# Altium PCB Right_Flex.PcbDoc
Units mm, origin at the board's own origin, x right, y up, seen from the top; angles counter-clockwise.
Board outline 14.38 x 9.98 mm, 2 copper layers (Top Layer, Bottom Layer), stack 0.049 mm thick; 2 components, 26 nets, 88 pads, 70 vias.
Unrouted connection lines stored in the file: 75.
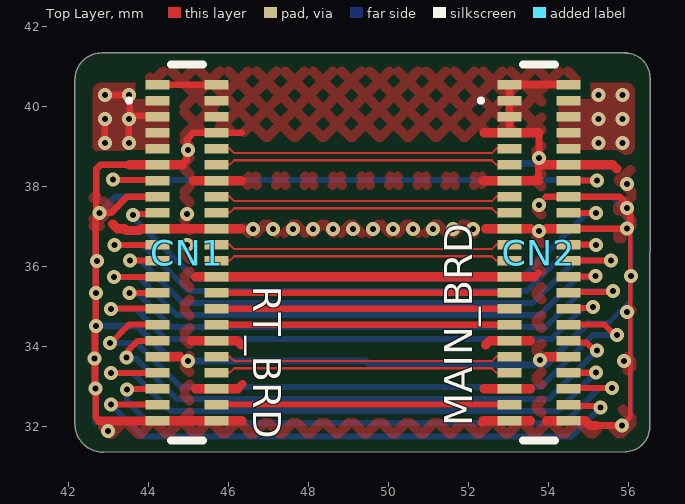
[diagram p0: Top Layer view]
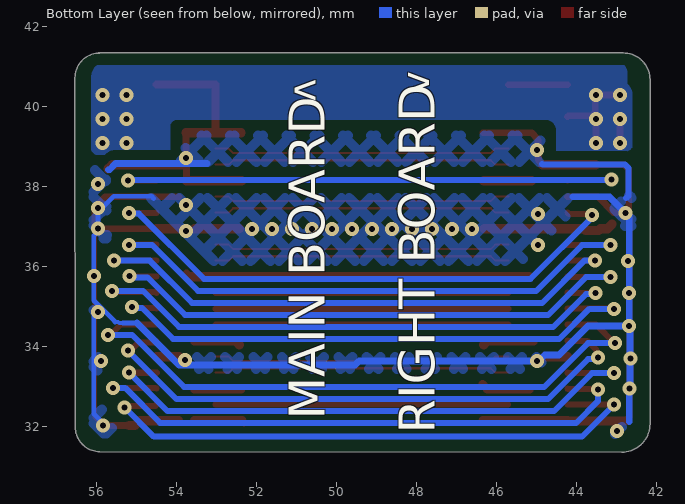
[diagram p1: Bottom Layer view, seen from below]

## Layer stack, top to bottom
Top Solder: solder mask 0.0275, Solder Resist, Dk 2.9
Top Layer: signal copper 0.012
Dielectric1: prepreg 0.025, FR-4, Dk 3.3
Bottom Layer: signal copper 0.012
Bottom Solder: solder mask 0.0275, Solder Resist, Dk 2.9

## Board outline
42.153,32.076 42.153,40.682 cw(c42.821,40.682) 42.821,41.35 55.95,41.35 55.91,41.347 cw(c55.91,40.727) 56.53,40.727 56.523,32 cw(c55.905,32) 55.905,31.382 55.926,31.382 42.861,31.368 cw(c42.861,32.076)

## Design rules (kind name [scope] priority, off if disabled: settings)
BoardOutlineClearance Stiffener [OnLayer('Stiffener')] p1: gap=0 ignorepadtopadclearanceinfootprint=FALSE except(0.3: Track-OutlineEdge Track-CutoutEdge THPad-OutlineEdge THPad-CutoutEdge Via-OutlineEdge Via-CutoutEdge Fill-CutoutEdge Poly-CutoutEdge Region-CutoutEdge)
BoardOutlineClearance BoardOutlineClearanceAll [All] p2: gap=0 ignorepadtopadclearanceinfootprint=FALSE except(0.3: Track-OutlineEdge Track-CutoutEdge SMDPad-OutlineEdge THPad-OutlineEdge THPad-CutoutEdge Via-OutlineEdge Via-CutoutEdge Fill-OutlineEdge Fill-CutoutEdge Poly-OutlineEdge Poly-CutoutEdge Region-CutoutEdge)
Clearance [All] p1: gap=0.254 ignorepadtopadclearanceinfootprint=FALSE except(0: Via-Text Fill-Text Poly-Text Region-Text; 0.076: Arc-Arc Arc-Track Track-Track; 0.1: Arc-Via Track-Via; 0.127: SMDPad-SMDPad; 0.15: Arc-SMDPad Track-SMDPad Text-Text; 0.2: Arc-THPad Arc-Text Arc-Hole Track-THPad Track-Text Track-Hole SMDPad-THPad SMDPad-Via SMDPad-Text SMDPad-Hole THPad-THPad THPad-Via THPad-Text THPad-Hole Via-Via Via-Hole Fill-Hole Poly-Hole Region-Hole Text-Hole)
DiffPairsRouting [InDifferentialPairClass('All Differential Pairs')] p1: maxlimit=0.127 minlimit=0.127 mostfreqgap=0.127 toplayer_minwidth=0.052 toplayer_maxwidth=0.052 toplayer_prefwidth=0.052 bottomlayer_minwidth=0.052 bottomlayer_maxwidth=0.052 bottomlayer_prefwidth=0.052 maxuncoupledlength=12.7
HoleSize [All] p1: absolutevalues=TRUE maxlimit=7.62 minlimit=0.15 maxpercent=80.000 minpercent=20.000
HoleToHoleClearance [IsPad vs IsPad] p1: gap=0.45 allowstackedmicrovias=TRUE
MatchedLengths MatchedLengths_1 [All] p1: tolerance=0.127 checknetsindiffpair=TRUE checkdiffpairvsdiffpair=FALSE checkxsignals=FALSE checkothers=FALSE
MinimumAnnularRing [All] p1: minimumring=0.1
MinimumSolderMaskSliver [All] p1: minsoldermaskwidth=0
PlaneClearance [All] p1: clearance=0.3
PlaneConnect [All] p1: pad.planeconnectstyle=Relief pad.reliefexpansion=0.508 pad.reliefentries=4 pad.reliefconductorwidth=0.254 pad.reliefairgap=0.254 via.planeconnectstyle=Direct via.reliefexpansion=0.508 via.reliefentries=4 via.reliefconductorwidth=0.254 via.reliefairgap=0.254
PolygonConnect ALL [All] p1: connectstyle=Direct reliefconductorwidth=0.254 reliefentries=4 polygonreliefangle="90 Angle" airgapwidth=0.254
PolygonConnect 3V3 [InNet('+3V3')] p2: connectstyle=Direct reliefconductorwidth=0.254 reliefentries=4 polygonreliefangle="90 Angle" airgapwidth=0.254
PolygonConnect GND [InNet('GND')] p3: thpad.connectstyle=Relief thpad.reliefconductorwidth=0.254 thpad.reliefentries=4 thpad.polygonreliefangle="90 Angle" thpad.airgapwidth=0.254 smdpad.connectstyle=Relief smdpad.reliefconductorwidth=0.254 smdpad.reliefentries=4 smdpad.polygonreliefangle="90 Angle" smdpad.airgapwidth=0.254 via.connectstyle=Direct via.reliefconductorwidth=0.254 via.reliefentries=4 via.polygonreliefangle="90 Angle" via.airgapwidth=0.254
PolygonConnect 5V [InNet('+5V')] p4: connectstyle=Direct reliefconductorwidth=0.254 reliefentries=4 polygonreliefangle="90 Angle" airgapwidth=0.254
RoutingVias [All] p1: holewidth=0.15 width=0.35 viastyle="Through Hole" minholewidth=0.15 minwidth=0.35 maxholewidth=0.254 maxwidth=0.508
SMDNeckDown [All] p1: percent=200.000
SilkToSilkClearance [All] p1: silktosilkclearance=0.15
SilkToSolderMaskClearance SilkscreenOverComponentPads [IsPad] p1: minsilkscreentomaskgap=0.15 clearancetoexposedcopper=TRUE
SolderMaskExpansion [All] p1: expansion=0.1 istentingtop=FALSE
Width [All] p1: maxlimit=4 minlimit=0.051 preferedwidth=0.17
22 further rules are at their usual default settings.

## Classes and differential pairs
differential pair class "USB 2.0": E2
differential pair class "PCIe Gen 3x1": PCIE_CLK PCIE_RX PCIE_TX
differential pair PCIE_TX: +PCIE_TX_P -PCIE_TX_N
differential pair PCIE_RX: +PCIE_RX_P -PCIE_RX_N
differential pair PCIE_CLK: +PCIE_CLK_P -PCIE_CLK_N
differential pair E2: +E2_P -E2_N

## Components (designator, comment, footprint, x,y, rotation, side; value= is the part's Value field where it differs from the comment)
CN1 "RT_BRD" BM20B0840DP04V53 44.958,36.357 r90 top locked
CN2 "MAIN_BRD" BM20B0840DP04V53 53.752,36.357 r90 top

## Footprints (in the part's own frame and the unit in brackets; to place one, negate y for a bottom-side part, rotate by r counter-clockwise, add the part's x,y. Pads: shape width x height; smd on the part's side, far side on the other; paste and mask are expansions set on the pad)
BM20B0840DP04V53 [mm]
  rect 0.23x0.6 smd mask+0.09: 1(3.8,0.74) 2(3.8,-0.74) 3(3.4,0.74) 4(3.4,-0.74) 5(3,0.74) 6(3,-0.74) 7(2.6,0.74) 8(2.6,-0.74) 9(2.2,0.74) 10(2.2,-0.74) 11(1.8,0.74) 12(1.8,-0.74) 13(1.4,0.74) 14(1.4,-0.74) 15(1,0.74) 16(1,-0.74) 17(0.6,0.74) 18(0.6,-0.74) 19(0.2,0.74) 20(0.2,-0.74) 21(-0.2,0.74) 22(-0.2,-0.74) 23(-0.6,0.74) 24(-0.6,-0.74) 25(-1,0.74) 26(-1,-0.74) 27(-1.4,0.74) 28(-1.4,-0.74) 29(-1.8,0.74) 30(-1.8,-0.74) 31(-2.2,0.74) 32(-2.2,-0.74) 33(-2.6,0.74) 34(-2.6,-0.74) 35(-3,0.74) 36(-3,-0.74) 37(-3.4,0.74) 38(-3.4,-0.74) 39(-3.8,0.74) 40(-3.8,-0.74) MP1(4.2,0.74) MP2(4.2,-0.74) MP3(-4.2,0.74) MP4(-4.2,-0.74)
  silkscreen extent -4.7,-0.4 4.7,1.5, body extent -4.7,-1.02 4.7,1.02, height 0.86

## Part data
CN1 CN2: library part BM20B(0.8)-40DP-0.4V(53), "Connector", Manufacturer_Name=Hirose, Manufacturer_Part_Number=BM20B(0.8)-40DP-0.4V(51), Supplier Part Number 1=798-BM20B0840DP04V53, Datasheet Link=https://www.hirose.com/en/product/document?clcode=CL0684-9005-6-51&productname=BM20B(0.8)-40DP-0.4V(51)&series=BM20&documenttype=2DDrawing&lang=en&documentid=0000948948, Height=0.76mm, Supplier 1=Mouser, System=Connector

## Via types
v1: diameter 0.35, hole 0.15, Top Layer to Bottom Layer, tented both sides, 70 vias

## Nets (pads, with @x,y where several pads share a name; then routed paths per layer and width w, separated by ;. In a path a pad name is that pad's centre, name@x,y a point inside that pad or via, vN(x,y) a via of type N, cw(c..) or ccw(c..) an arc to the next point about the centre after c; other vN are vias at no path point)
+3V3: CN1.1 CN1.3 CN1.5 CN1.7 CN2.2 CN2.4 CN2.6 CN2.8 | length 3
  Top Layer w0.17: v1(42.9,39.1) v1(42.9,39.7) ; v1(42.9,40.3) v1(43.5,40.3) 43.522,40.278 43.522,39.878 43.622,39.778 44.197,39.778 CN1.3 ; v1(43.5,39.1) v1(43.5,39.7)
  other v1: 55.244,39.1 55.844,39.1 55.244,39.7 55.844,39.7 55.244,40.3 55.844,40.3
DOWN: CN1.31 CN2.32 | length 14.5
  Top Layer w0.15: v1(43.448,33.737) 43.486,33.776 43.486,33.916 43.724,34.154 44.215,34.154 CN1.31 ; CN2.32@54.499,34.15 54.532,34.117 54.939,34.117 55.149,33.906 v1(55.203,33.906)
  Bottom Layer w0.15: v1(43.448,33.737) 43.486,33.699 43.701,33.699 44.7,32.7 53.996,32.7 v1(55.203,33.906)
E2_N: CN1.36 CN2.35 | length 7.4
  Top Layer w0.052: CN1.36 46.024,33.357 46.135,33.467 52.576,33.467 52.686,33.357 CN2.35
E2_P: CN1.34 CN2.33 | length 7.4
  Top Layer w0.052: CN1.34 46.024,33.757 46.135,33.646 52.576,33.646 52.686,33.757 CN2.33
GND: CN1.2 CN1.4 CN1.6 CN1.9 CN1.12 CN1.13 CN1.17 CN1.18 CN1.24 CN1.32 CN1.33 CN1.38 CN1.MP1 CN1.MP2 CN1.MP3 CN1.MP4 CN2.1 CN2.3 CN2.5 CN2.10 CN2.11 CN2.14 CN2.17 CN2.18 CN2.23 CN2.31 CN2.34 CN2.37 CN2.MP1 CN2.MP2 CN2.MP3 CN2.MP4 | length 92.5
  Top Layer w0.12: v1(55.826,32.033) 56.035,32.242 56.035,36.81 55.95,36.895 v1(55.95,36.957)
  Top Layer w0.15: 46.325,32.157 46.336,32.146
  Top Layer w0.17: v1(42.637,33.705) 42.654,33.688 42.654,32.997 42.671,32.98 42.671,32.249 42.774,32.146 ; v1@42.674,33.674 42.656,33.693 42.656,34.507 v1(42.675,34.525) v1(42.675,35.35) 42.674,36.15 v1@42.674,37.215 ; 43.51,38.553 42.786,38.553 42.687,38.454 42.687,37.431 v1(42.764,37.353) 43.053,37.353 43.457,37.757 CN1.13 ; CN1.MP3@44.207,32.146 CN1.MP3 ; CN1.9@44.214,38.553 CN1.9 ; CN1.MP1 CN1.MP2 ; 44.779,33.757 44.782,33.76 ; 44.839,38.557 44.941,38.658 44.941,38.891 v1(44.975,38.925) 44.95,38.95 44.95,39.188 45.119,39.357 CN1.6 46.325,39.357 ; 52.3,32.1 52.357,32.157 ; 53.644,35.754 53.744,35.853 ; 53.744,38.15 53.744,38.55 53.751,38.557 53.751,38.724 v1(53.75,38.725) 53.752,38.727 53.752,39.357 ; 53.922,37.757 CN2.14 55.768,37.757 56.037,37.488 v1@56.037,36.957 ; CN2.18 v1(55.95,36.957) ; 55.171,32.033 v1(55.826,32.033)
  Top Layer w0.2: 46.223,32.957 46.336,33.07 ; 52.368,32.968 52.379,32.957 ; CN2.5 CN2.3 CN2.1 CN2.MP1 CN2.MP2
  Top Layer w0.23: 42.774,32.146 CN1.MP3@44.207,32.146 ; 43.1,37.075 43.218,36.957 43.391,36.957 43.438,36.91 43.762,36.91 43.809,36.957 CN1.17 CN1.18 46.305,36.957 ; 43.51,38.553 CN1.9@44.214,38.553 ; CN1.MP3 CN1.MP4 46.325,32.157 ; CN1.33 44.779,33.757 ; CN1.9 44.839,38.557 ; 45.068,34.157 CN1.32 46.212,34.157 46.312,34.057 ; 45.119,38.157 CN1.12 46.305,38.157 46.312,38.15 ; 45.165,32.957 CN1.38 46.223,32.957 ; 45.175,35.757 CN1.24 53.067,35.757 CN2.23@53.069,35.755 ; 52.357,32.157 CN2.MP3 53.542,32.157 ; 52.362,38.157 CN2.11 53.737,38.157 53.744,38.15 ; 52.379,32.957 CN2.37 53.542,32.957 53.543,32.956 ; 52.379,39.357 CN2.5 53.752,39.357 ; 52.421,34.054 52.524,34.157 CN2.31 53.543,34.157 ; 52.421,36.957 CN2.17 53.542,36.957 ; CN2.23@53.069,35.754 53.644,35.754 ; v1@53.751,38.557 CN2.10 55.596,38.557 55.7,38.453 ; 53.929,33.757 CN2.34 ; 53.944,32.157 54.911,32.157 55.035,32.033 55.171,32.033 ; 53.944,36.957 CN2.18
  Bottom Layer w0.1: 55.327,34.6 55.422,34.6 55.448,34.627 55.527,34.627
  Bottom Layer w0.12: 54.558,37.709 54.615,37.766 55.561,37.766 55.95,37.377 v1(55.95,36.957) 55.95,36.895 56.061,36.784 56.061,35.161 55.527,34.627 ; 54.975,34.6 55.327,34.6 ; v1(55.826,32.033) 55.826,32.095 56.061,32.33 v1@56.061,34.8
  Bottom Layer w0.15: 42.749,37.72 42.694,37.775 42.694,38.477 42.782,38.565 44.847,38.565 44.852,38.57
  Bottom Layer w0.17: v1(42.637,33.705) 42.654,33.688 42.654,32.975 v1(42.671,32.958) ; 42.674,32.132 v1@42.674,32.977 ; v1@42.674,33.674 42.656,33.693 42.656,34.575 42.674,34.594 v1(42.675,35.35) 42.674,36.15 v1@42.674,37.274 ; v1(42.675,34.525) 43.7,34.525 44.425,33.8 44.785,33.8 44.935,33.65 49.424,33.65 49.524,33.55 53.925,33.55 54.975,34.6 ; v1(42.764,37.353) 43.165,37.754 44.078,37.754 ; 53.226,38.58 53.229,38.583 55.515,38.583 55.668,38.43 55.689,38.43
  other v1: 42.975,31.9 44.975,33.65 55.875,33.65 53.775,33.675 55.95,34.875 56.05,35.775 42.7,36.15 44.95,36.55 53.75,36.9 46.6,36.95 47.1,36.95 47.6,36.95 48.1,36.95 48.6,36.95 49.1,36.95 49.6,36.95 50.1,36.95 50.6,36.95 51.1,36.95 51.6,36.95 52.1,36.95 44.95,37.325 55.95,37.475 53.75,37.55 55.95,38.075
HK/MISO: CN1.23 CN2.24 | length 14.6
  Top Layer w0.15: v1(43.135,35.746) 43.141,35.752 44.212,35.752 CN1.23 ; CN2.24 54.498,35.763 55.163,35.763 v1(55.169,35.769)
  Bottom Layer w0.15: v1(43.135,35.746) 43.754,35.746 44.7,34.8 53.775,34.8 54.711,35.736 55.136,35.736 v1(55.169,35.769)
L1/SCK: CN1.19 CN2.20 | length 14.8
  Top Layer w0.15: v1(43.143,36.55) 44.211,36.55 CN1.19 ; CN2.20 54.494,36.555 55.175,36.555 v1(55.177,36.554)
  Bottom Layer w0.15: v1(43.143,36.55) 43.85,36.55 45,35.4 53.45,35.4 54.604,36.554 v1(55.177,36.554)
L2: CN1.37 CN2.38 | length 14.9
  Top Layer w0.15: v1(43.456,32.931) 43.469,32.944 44.205,32.944 CN1.37 ; CN2.38 54.512,32.977 v1(55.574,32.977)
  Bottom Layer w0.15: v1(43.456,32.931) 43.456,32.644 44,32.1 54.4,32.1 55.277,32.977 v1(55.574,32.977)
L3/MOSI: CN1.29 CN2.30 | length 16.3
  Top Layer w0.15: v1(43.034,34.1) 43.044,34.1 43.501,34.557 CN1.29 ; CN2.30 55.391,34.557 55.648,34.3 v1(55.7,34.3)
  Bottom Layer w0.15: v1(43.034,34.1) 43.7,34.1 44.8,33 53.8,33 55.1,34.3 v1(55.7,34.3)
LEFT: CN1.35 CN2.36 | length 14.8
  Top Layer w0.15: v1(43.057,33.35) 43.061,33.353 44.214,33.353 CN1.35
  Top Layer w0.17: CN2.36@54.493,33.356 v1(55.176,33.356)
  Bottom Layer w0.15: v1(43.057,33.35) 43.6,33.35 44.55,32.4 54.219,32.4 v1@55.175,33.356
LX: CN1.15 CN2.16 | length 14.3
  Top Layer w0.15: v1(43.6,37.3) 43.628,37.328 44.189,37.328 CN1.15 ; CN2.16 54.496,37.353 v1(55.181,37.353)
  Bottom Layer w0.15: v1(43.6,37.3) 43.6,37.246 45.146,35.7 53.3,35.7 54.935,37.335 55.162,37.335 v1(55.181,37.353)
LY: CN1.11 CN2.12 | length 13.9
  Top Layer w0.15: v1(43.11,38.19) 43.127,38.173 44.201,38.173 CN1.11 ; CN2.12 v1(55.203,38.157)
  Bottom Layer w0.15: v1(43.11,38.19) 43.126,38.173 55.186,38.173 v1(55.203,38.157)
PCIE_CLK_N: CN1.10 CN2.9 | length 7.4
  Top Layer w0.052: CN1.10 46.024,38.557 46.135,38.667 52.576,38.667 52.686,38.557 CN2.9
PCIE_CLK_P: CN1.8 CN2.7 | length 7.4
  Top Layer w0.052: CN1.8 46.024,38.957 46.135,38.846 52.576,38.846 52.686,38.957 CN2.7
PCIE_CLK_REQ: CN1.28 CN2.27 | length 7.3
  Top Layer w0.17: CN1.28 CN2.27
PCIE_EN: CN1.25 CN2.26 | length 14.6
  Top Layer w0.15: v1(43.519,35.352) 43.521,35.354 44.215,35.354 CN1.25 ; CN2.26@54.489,35.354 54.514,35.379 55.579,35.379 v1(55.6,35.4)
  Bottom Layer w0.15: v1(43.519,35.352) 43.55,35.321 43.754,35.321 44.575,34.5 53.925,34.5 54.825,35.4 v1(55.6,35.4)
PCIE_nWAKE: CN1.30 CN2.29 | length 7.3
  Top Layer w0.17: CN1.30 CN2.29
PCIE_RST: CN1.26 CN2.25 | length 7.3
  Top Layer w0.17: CN1.26 CN2.25
PCIE_RX_N: CN1.16 CN2.15 | length 7.4
  Top Layer w0.052: CN1.16 46.024,37.357 46.135,37.467 52.576,37.467 52.686,37.357 CN2.15
PCIE_RX_P: CN1.14 CN2.13 | length 7.4
  Top Layer w0.052: CN1.14 46.024,37.757 46.135,37.646 52.576,37.646 52.686,37.757 CN2.13
PCIE_TX_N: CN1.22 CN2.21 | length 7.4
  Top Layer w0.052: CN1.22 46.024,36.157 46.135,36.267 52.576,36.267 52.686,36.157 CN2.21
PCIE_TX_P: CN1.20 CN2.19 | length 7.4
  Top Layer w0.052: CN1.20 46.024,36.557 46.135,36.446 52.576,36.446 52.686,36.557 CN2.19
RIGHT: CN1.39 CN2.40 | length 14.9
  Top Layer w0.15: v1(43.054,32.557) CN1.39 ; CN2.40 54.521,32.529 55.243,32.529 v1(55.286,32.486)
  Bottom Layer w0.15: v1(43.054,32.557) 43.854,31.757 54.557,31.757 v1(55.286,32.486)
SELECT: CN1.21 CN2.22 | length 14.7
  Top Layer w0.15: v1@43.527,36.156 CN1.21@44.217,36.156 ; CN2.22 v1(55.558,36.157)
  Bottom Layer w0.15: v1(43.526,36.156) 43.794,36.156 44.85,35.1 53.6,35.1 54.657,36.157 v1(55.558,36.157)
UP: CN1.27 CN2.28 | length 14.5
  Top Layer w0.15: v1(43.057,34.954) 43.059,34.955 44.216,34.955 CN1.27 ; CN2.28 54.514,34.979 55.079,34.979 v1(55.1,35)
  Bottom Layer w0.15: v1(43.057,34.954) 43.671,34.954 44.425,34.2 54.075,34.2 54.855,34.98 55.08,34.98 v1(55.1,35)
VIB: CN1.40 CN2.39 | length 7.3
  Top Layer w0.15: CN1.40 CN2.39

## Polygon pours and split planes (outlines as drawn)
+3V3 on Bottom Layer "NONET_L01_P-001" (solid, pour order 13): 55.954,38.8 ccw(c55.954,38.971) 56.075,38.85 ccw(c55.954,38.971) 56.125,38.971 56.125,40.723 ccw(c55.698,40.723) 56,41.025 ccw(c55.759,40.784) 55.759,41.125 42.981,41.125 ccw(c42.981,40.869) 42.8,41.05 ccw(c42.981,40.869) 42.725,40.869 42.725,40.646 cw(c42.554,40.646) 42.675,40.525 ccw(c42.856,40.344) 42.6,40.344 42.6,38.971 ccw(c42.771,38.971) 42.65,38.85 ccw(c42.771,38.971) 42.771,38.8 43.615,38.8 ccw(c43.615,38.885) 43.675,38.825 cw(c43.735,38.765) 43.735,38.85 44.415,38.85 ccw(c44.415,38.935) 44.475,38.875 ccw(c44.415,38.935) 44.5,38.935 44.5,39.419 cw(c44.756,39.419) 44.575,39.6 cw(c44.756,39.419) 44.756,39.675 53.979,39.675 cw(c53.979,39.504) 54.1,39.625 cw(c53.979,39.504) 54.15,39.504 54.15,38.935 ccw(c54.235,38.935) 54.175,38.875 ccw(c54.235,38.935) 54.235,38.85 54.89,38.85 cw(c54.89,38.765) 54.95,38.825 ccw(c55.01,38.885) 55.01,38.8 55.075,38.8
GND on Bottom Layer "NONET_L01_P-001" (hatched 45Degree grid 0.5 track 0.25, remove dead copper, pour order 19): 42.604,42.5 ccw(c42.604,41.646) 42,42.25 ccw(c42.604,41.646) 41.75,41.646 41.75,31.604 ccw(c42.604,31.604) 42,31 ccw(c42.604,31.604) 42.604,30.75 56.146,30.75 ccw(c56.146,31.604) 56.75,31 ccw(c56.146,31.604) 57,31.604 57,41.146 ccw(c56.146,41.146) 56.75,41.75 ccw(c56.146,41.146) 56.146,42 54.604,42 cw(c54.604,42.854) 54,42.25 ccw(c53.396,41.646) 53.396,42.5 50.75,42.5
no net on Bottom Courtyard "NONET_L01_P-001" (solid): 42.161,40.685 42.161,32.048 ccw(c42.83,32.048) 42.83,31.379 46.334,31.379 ccw(c46.284,32.073) 46.979,32.07 46.988,40.649 ccw(c46.341,40.696) 46.436,41.338 42.816,41.34 ccw(c42.816,40.685)
no net on Bottom Courtyard "NONET_L01_P-001" (solid): 52.371,41.35 ccw(c52.356,40.737) 51.742,40.751 51.742,31.995 ccw(c52.342,31.989) 52.349,31.389 55.931,31.389 ccw(c55.931,31.979) 56.521,31.979 56.53,40.74 ccw(c55.923,40.741) 55.924,41.348
no net on Bottom Courtyard "NONET_L04_P-001" (solid, pour order 8): 43.44,41.276 43.44,31.45 46.497,31.45 46.497,41.251 46.472,41.276
GND on Top Layer "NONET_L01_P-001" (hatched 45Degree grid 0.5 track 0.25, remove dead copper, pour order 14): 42.354,42.5 ccw(c42.354,41.646) 41.75,42.25 ccw(c42.354,41.646) 41.5,41.646 41.5,31.604 ccw(c42.354,31.604) 41.75,31 ccw(c42.354,31.604) 42.354,30.75 55.896,30.75 ccw(c55.896,31.604) 56.5,31 ccw(c55.896,31.604) 56.75,31.604 56.75,41.146 ccw(c55.896,41.146) 56.5,41.75 ccw(c55.896,41.146) 55.896,42 54.354,42 cw(c54.354,42.854) 53.75,42.25 ccw(c53.146,41.646) 53.146,42.5 50.5,42.5
+3V3 on Top Layer "NONET_L01_P-001" (solid, pour order 9): 44,40.3 ccw(c43.7,40.3) 43.7,40.6 42.8,40.6 ccw(c42.8,40.4) 42.6,40.4 42.6,39 ccw(c42.8,39) 42.8,38.8 44.4,38.8 ccw(c44.4,38.9) 44.5,38.9 44.5,40.1 ccw(c44.4,40.1) 44.4,40.2 44.1,40.2 cw(c44.1,40.3)
+3V3 on Top Layer "NONET_L01_P-001" (solid, pour order 10): 54.744,40.3 cw(c55.044,40.3) 55.044,40.6 55.944,40.6 cw(c55.944,40.4) 56.144,40.4 56.144,39 cw(c55.944,39) 55.944,38.8 54.344,38.8 cw(c54.344,38.9) 54.244,38.9 54.244,40.1 cw(c54.344,40.1) 54.344,40.2 54.644,40.2 ccw(c54.644,40.3)

## Silkscreen, mask and mechanical layers (free items; w line width, h text height)
Bottom Overlay:
  text "v" at 47.673,40.313 h0.7 r270
  text "v" at 51.04,40.128 h0.7 r90
  text "MAIN BOARD" at 50.284,32.178 h0.9 r270
  text "RIGHT BOARD" at 47.535,31.828 h0.9 r270
Board Outline:
  lines w0.15: 55.905,31.382 ccw(c55.905,32) 56.523,32 56.53,40.727 ccw(c55.91,40.727) 55.91,41.347 ; 55.926,31.382 42.861,31.368 cw(c42.861,32.076) 42.153,32.076 42.153,40.682 cw(c42.821,40.682) 42.821,41.35 55.95,41.35
Stiffener:
  lines w0.15: 45.4,31 45.4,30 53.1,31.1
  text "Stiffener: Stainless Steel" at 42.45,28.95 h0.7
  text "Stiffener Thickness: 0.2mm" at 42.45,27.75 h0.7
  text "Stiffener Location: Shown on this layer(GM20)" at 42.45,26.583 h0.7
  text "Place under bottom layer side opposite the exposed pads" at 42.45,25.383 h0.7

## Dimensions
53.752,42.336 to 56.421,42.336 on Bottom Courtyard
54.492,40.557 to 53.752,40.541 on Bottom Courtyard
44.958,44.33 to 55.591,44.33 on Bottom Courtyard
44.958,41.883 to 56.847,43.077 on Bottom Courtyard
45.698,40.557 to 53.012,40.557 on Bottom Courtyard
54.492,40.557 to 56.847,43.077 on Bottom Courtyard
44.218,40.557 to 44.958,41.883 on Bottom Courtyard